# EAGLE board challenge1 (EAGLE 9.7.0)

Size 80.57 x 26.32 mm. Coordinates in mm from the lower left corner, seen from the top.
Outline: 0,0 80.58,0 80.58,26.32 0,26.32 0,0
Copper layers (1*16): Top 0.035mm / dielectric 1.5mm / Bottom 0.035mm
Design rules "default": minimum track width 6mil, minimum drill 0.35mm, track to track 6mil, track to pad 6mil, pad to pad 6mil, via to via 6mil, smd to smd 6mil, copper to edge 40mil, drill to drill 6mil, minimum pad ring 10mil, minimum via ring 8mil, stop-mask expansion 4mil, vias tented up to drill 0mil, thermal gap 10mil

## Footprints (pad centres in the part's own frame; a part is rotated, then mirrored left to right if it is on the bottom)
BATTERY-GENERIC = drill 1.118 pad 3.15 octagon: + 2.54,0; - -2.54,0
LEDRD254W60D565H860B = drill 0.981 pad 1.581: 1 -1.27,0; 2 1.27,0
RESAD1016W63L850D250B = drill 0.83 pad 1.43: 1 -5.08,0; 2 5.08,0
DIP762W53P254L1969H508Q14B = drill 0.743 pad 1.343: 1 -3.81,7.62; 2 -3.81,5.08; 3 -3.81,2.54; 4 -3.81,0; 5 -3.81,-2.54; 6 -3.81,-5.08; 7 -3.81,-7.62; 8 3.81,-7.62; 9 3.81,-5.08; 10 3.81,-2.54; 11 3.81,0; 12 3.81,2.54; 13 3.81,5.08; 14 3.81,7.62
TO220V = drill 1.016 long: 1 -2.54,-2.54; 2 0,-2.54; 3 2.54,-2.54

## Placement (x,y rotation side)
BAT1  9V  [BATTERY-GENERIC]  8.26,16.12 90 top
D1  RED  [LEDRD254W60D565H860B]  74.52,7.91 0 top
R1  5k  [RESAD1016W63L850D250B]  60.55,7.91 0 top
U1  74HC11_PDIP  [DIP762W53P254L1969H508Q14B]  40.23,16.8 90 top
U2  LM7805_TO220V  [TO220V]  22.45,23.15 0 top

## Library data of the parts
BAT1 R1 U1 U2 = Tinkercad
D1 = Tinkercad; CATEGORY: Opto-Electronic; SUB-CATEGORY: LED; VALUE: LED_RED

## Nets
BAT1+: BAT1.+ U2.1
BAT1-: BAT1.- D1.2 U2.2
D1_A: D1.1 R1.2
U1_2C: U1.3 U1.4 U1.5 U1.14 U2.3
U1_2Y: R1.1 U1.6

## Tracks (layer width: path | path; a pad name or v marks a point on that pad's centre or on a via)
BAT1+  (1 unrouted)
BAT1-  (2 unrouted)
D1_A  (1 unrouted)
U1_2C  (4 unrouted)
U1_2Y  (1 unrouted)